# Altium PCB PCB.PcbDoc (part 2 of 2)
Units mm, origin at the board's own origin, x right, y up, seen from the top; angles counter-clockwise.
Board outline 40 x 90 mm, 4 copper layers (Top Layer, Int1 (GND), Int2, Bottom Layer (GND)), stack 0.77 mm thick; 131 components, 93 nets, 436 pads, 796 vias.
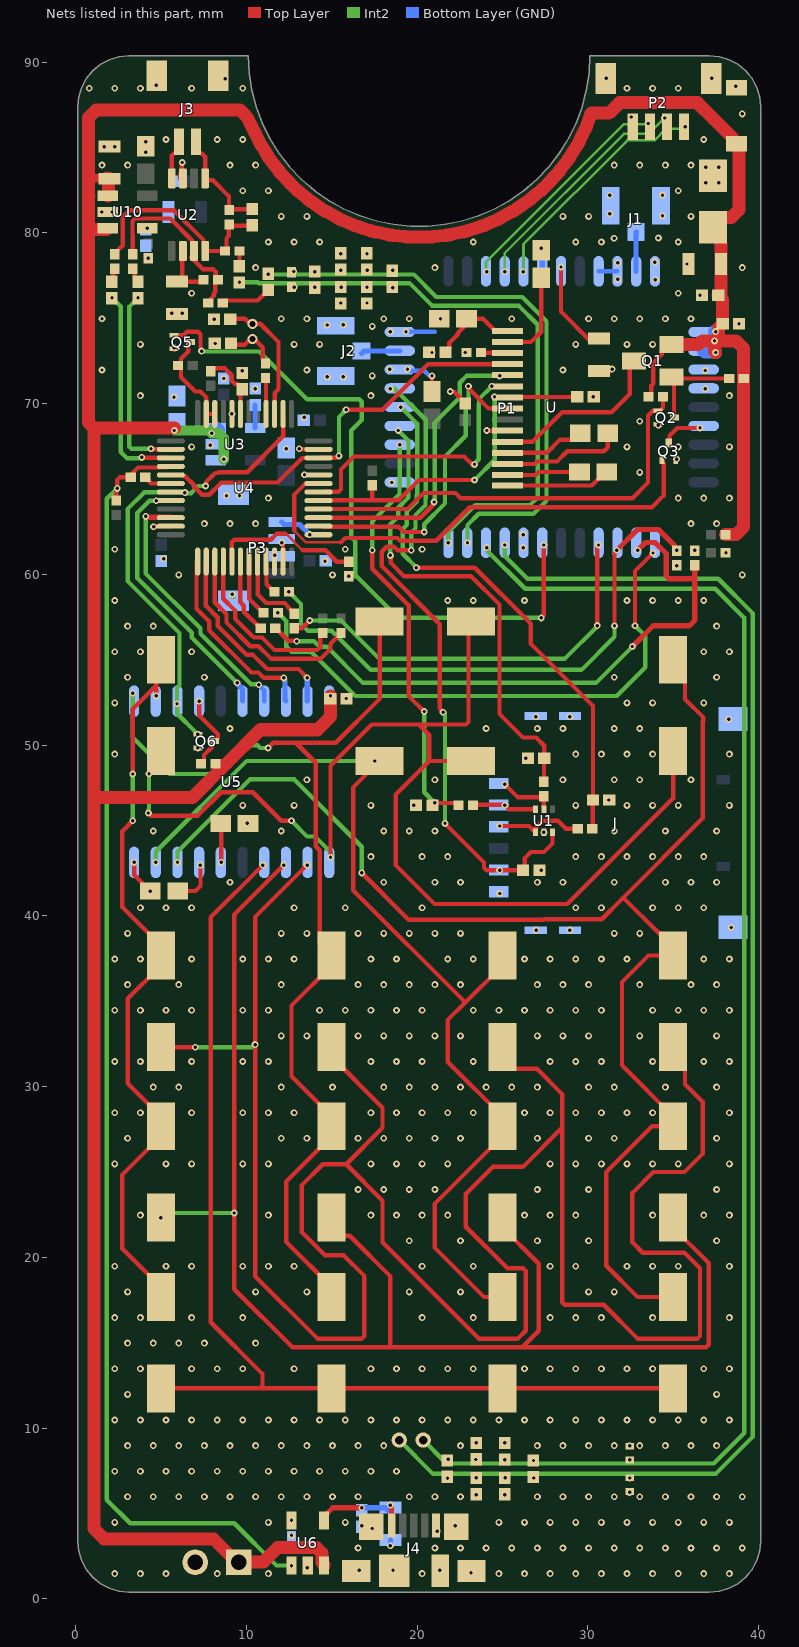
[diagram p4: the nets of this part, all layers, seen from the top]

## Via types
v1: diameter 0.4, hole 0.2, Top Layer to Bottom Layer (GND), tented both sides, 787 vias
v2: diameter 0.45, hole 0.198, Top Layer to Bottom Layer (GND), tented both sides, 9 vias

## Nets (pads, with @x,y where several pads share a name; then routed paths per layer and width w, separated by ;. In a path a pad name is that pad's centre, name@x,y a point inside that pad or via, vN(x,y) a via of type N, cw(c..) or ccw(c..) an arc to the next point about the centre after c; other vN are vias at no path point) (continued)
GND: C1.2 C2.2 C3.1 C4.1 C5.2 C6.2 C7.1 C8.2 C9.1 C10.1 C11.1 C12.1 C13.1 C16.1 C17.2 C18.2 C21.1 C22.1 C23.2 C24.1 C25.2 C26.2 C29.1 C30.1 C35.2 C36.2 C37.2 C38.1 C39.1 C41.1 C42.1 C43.1 C44.1 C45.1 C46.2 C47.2 C49.2 C50.2 C51.1 C52.2 C53.2 C100.2 C101.1 C102.1 D1.2 D2.1 D3.1 J1.2 J1.3 J2.2 J2.3 J3.3 J3.4 J4.5 J4.6 J4.7 J4.8 J4.9 J4.10 J4.11 J.C5 J.G1 J.G2 J.G3 J.G4 J.G5 J.G6 P1.6 P2.4 P2.MP1 P2.MP2 P3.3 P3.MP1 P3.MP2 P4.2 Q2.2 Q3.2 Q5.2 Q6.2 R4.2 R15.1 R24.2 R25.2 R26.2 R29.2 U1.2 U2.7 U3.2 U4.8 U4.23 U4.35 U4.44 U4.47 U5.10 U6.2 U10.2 U.8 U.13 U.19 U.21 U.27 U.30 U.31 U.33 U.36 U.37 | length 20.5
  Top Layer w0.254: v1(3.429,43.129) 3.429,42.404 3.903,41.93 3.903,41.832 C53.2@4.282,41.453 ; R15.1@4.21,78.461 v1(4.267,78.518) ; v1(4.572,62.789) 4.595,62.812 5.568,62.812 U4.23@5.581,62.825 ; v1(5.639,75.286) 5.908,75.286 C35.2@5.944,75.25 6.213,75.25 v1(6.248,75.286) ; Q5.2@5.758,73.209 5.758,73.185 Q5.2@5.791,73.152 ; U2.7@6.131,83.193 U2.7@6.131,83.459 ; U2.7@6.22,83.549 6.22,84.097 v1(6.248,84.125) ; C46.2@8.108,74.94 v1(8.129,74.94) ; C47.2@8.151,73.526 v1(8.172,73.526) ; C41.1@9.754,71.802 v1(9.754,71.918) ; v1(10.058,45.415) C52.2@10.098,45.415 ; v1(12.075,61.865) 12.075,61.825 12.147,61.753 12.147,61.446 12.164,61.429 U4.35@12.164,60.758 ; v1(13.106,67.361) 13.134,67.334 14.222,67.334 U4.47@14.231,67.325 ; v1(13.564,1.829) 13.601,1.866 U6.2@13.601,1.945 ; v1(15.85,52.73) C51.1@15.871,52.73 ; J4.8@16.437,1.631 16.566,1.631 v1(16.612,1.676) ; J4.6@17.324,4.206 17.324,4.164 v1(17.374,4.115) ; v1(18.593,1.676) 18.617,1.676 J4.9@18.662,1.631 ; v1(19.812,46.482) C23.2@19.943,46.482 ; C23.2@19.943,46.33 C23.2@19.964,46.33 ; C10.1@20.705,73 v1(20.879,73) ; C12.1@20.879,70.714 v1(20.879,71.628) ; J4.5@21.112,4.291 21.112,4.034 v1(21.184,3.962) ; C9.1@21.296,74.981 v1(21.376,74.981) ; v1(21.336,1.676) 21.362,1.65 J4.10@21.362,1.631 ; v1(21.946,70.714) 22.151,70.714 22.839,70.025 C13.1@22.839,70.004 ; v1(22.25,4.267) 22.25,4.255 J4.7@22.3,4.206 ; v1(22.828,73) R4.2@22.892,73 ; v1(23.165,1.524) 23.165,1.609 J4.11@23.187,1.631 ; C17.2@23.466,6.119 23.466,6.099 v1(23.47,6.096) ; C21.1@23.47,9.129 v1(23.47,9.144) ; v1(24.089,68.428) 24.093,68.423 25.294,68.423 P1.6@25.298,68.418 ; v1(25.146,6.096) 25.146,6.118 C18.2@25.149,6.121 ; C22.1@25.146,9.123 v1(25.146,9.144) ; v1(26.365,49.225) C16.1@26.496,49.225 ; C8.2@27.28,78.983 v1(27.28,79.096) ; v1(30.328,70.409) C11.1@30.349,70.409 ; v1(31.242,46.787) C24.1@31.263,46.787 ; v1(32.45,8.968) 32.461,8.957 D3.1@32.461,8.934 ; v1(32.454,6.234) D2.1@32.454,6.292 ; Q2.2@34.105,68.79 34.105,68.765 v1(34.138,68.732) ; Q3.2@35.147,66.718 35.18,66.751 v1(35.204,66.751) ; v1(35.204,60.503) R24.2@35.204,60.535 ; v1(35.814,78.181) C2.2@35.895,78.181 ; R25.2@36.271,61.385 v1(36.271,61.417) ; v1(36.576,76.352) C3.1@36.686,76.352 ; R26.2@38.068,61.265 v1(38.1,61.265) ; v1(38.672,88.582) 38.71,88.544 D1.2@38.71,88.503
  Top Layer w0.305: C5.2@27.17,42.672 v1(27.28,42.672) ; C1.2@30.656,71.917 31.319,71.917 v1(31.43,72.027)
  Int2 w0.254: v1@9.189,58.679 v1@9.256,58.679 ; v1(27.28,79.096) 27.28,79.056 v1@27.339,78.996
  Bottom Layer (GND) w0.254: v1(19.355,74.219) 21.031,74.219 ; v1(19.443,72.006) 19.517,71.933 20.422,71.933 20.698,71.656 20.851,71.656 v1(20.879,71.628) ; U.30@30.639,77.749 U.31@31.739,77.749
  Bottom Layer (GND) w0.305: C50.2@16.764,4.115 C50.2@16.764,4.224 ; v1(18.44,3.109) C49.2@18.44,3.434 ; v1(27.28,79.096) 27.28,79.07 27.339,79.01 U.27@27.339,77.749 ; v1(31.547,79.691) v1@31.565,79.673
  other v1: 2.298,1.472 3.798,1.472 5.298,1.472 8.298,1.472 11.298,1.472 20.298,1.472 24.798,1.472 26.298,1.472 27.798,1.472 29.298,1.472 30.798,1.472 32.298,1.472 33.798,1.472 35.298,1.472 36.798,1.472 38.298,1.472 16.548,2.972 21.048,2.972 22.548,2.972 24.048,2.972 25.548,2.972 27.048,2.972 28.548,2.972 30.048,2.972 31.548,2.972 33.048,2.972 34.548,2.972 36.048,2.972 37.548,2.972 39.048,2.972 12.649,3.712 16.764,4.267 2.298,4.472 11.298,4.472 15.798,4.472 24.798,4.472 26.298,4.472 27.798,4.472 29.298,4.472 30.798,4.472 32.298,4.472 33.798,4.472 35.298,4.472 36.798,4.472 38.298,4.472 3.048,5.972 4.548,5.972 6.048,5.972 7.548,5.972 9.048,5.972 10.548,5.972 12.048,5.972 13.548,5.972 15.048,5.972 16.548,5.972 19.548,5.972 21.048,5.972 22.548,5.972 27.048,5.972 28.548,5.972 30.048,5.972 31.548,5.972 33.048,5.972 34.548,5.972 36.048,5.972 37.548,5.972 39.048,5.972 2.298,7.472 3.798,7.472 5.298,7.472 6.798,7.472 8.298,7.472 9.798,7.472 11.298,7.472 12.798,7.472 14.298,7.472 15.798,7.472 17.298,7.472 18.798,7.472 3.048,8.972 4.548,8.972 6.048,8.972 7.548,8.972 9.048,8.972 10.548,8.972 12.048,8.972 13.548,8.972 15.048,8.972 16.548,8.972 18.048,8.972 22.548,8.972 27.048,8.972 28.548,8.972 30.048,8.972 31.548,8.972 33.048,8.972 34.548,8.972 36.048,8.972 37.548,8.972 2.298,10.472 3.798,10.472 5.298,10.472 6.798,10.472 8.298,10.472 9.798,10.472 11.298,10.472 12.798,10.472 14.298,10.472 15.798,10.472 17.298,10.472 18.798,10.472 20.298,10.472 21.798,10.472 23.298,10.472 24.798,10.472 26.298,10.472 27.798,10.472 29.298,10.472 30.798,10.472 32.298,10.472 33.798,10.472 35.298,10.472 36.798,10.472 38.298,10.472 3.048,11.972 37.548,11.972 2.298,13.472 3.798,13.472 6.798,13.472 8.298,13.472 9.798,13.472 12.798,13.472 17.298,13.472 18.798,13.472 20.298,13.472 21.798,13.472 23.298,13.472 26.298,13.472 27.798,13.472 29.298,13.472 30.798,13.472 32.298,13.472 33.798,13.472 36.798,13.472 38.298,13.472 3.048,14.972 4.548,14.972 6.048,14.972 7.548,14.972 10.548,14.972 2.298,16.472 3.798,16.472 6.798,16.472 9.798,16.472 20.298,16.472 23.298,16.472 27.798,16.472 29.298,16.472 30.798,16.472 33.798,16.472 38.298,16.472 3.048,17.972 10.548,17.972 13.548,17.972 19.548,17.972 22.548,17.972 30.048,17.972 31.548,17.972 2.298,19.472 5.298,19.472 6.798,19.472 9.798,19.472 11.298,19.472 12.798,19.472 20.298,19.472 23.298,19.472 27.798,19.472 29.298,19.472 32.298,19.472 33.798,19.472 35.298,19.472 38.298,19.472 19.548,20.972 22.548,20.972 27.048,20.972 30.048,20.972 37.548,20.972 3.798,22.472 11.298,22.472 17.298,22.472 18.798,22.472 20.298,22.472 21.798,22.472 26.298,22.472 27.798,22.472 29.298,22.472 33.798,22.472 36.798,22.472 38.298,22.472 16.548,23.972 18.048,23.972 19.548,23.972 21.048,23.972 27.048,23.972 30.048,23.972 37.548,23.972 2.298,25.472 5.298,25.472 6.798,25.472 9.798,25.472 11.298,25.472 17.298,25.472 18.798,25.472 20.298,25.472 21.798,25.472 27.798,25.472 29.298,25.472 30.798,25.472 32.298,25.472 33.798,25.472 35.298,25.472 38.298,25.472 3.048,26.972 12.048,26.972 13.548,26.972 16.548,26.972 18.048,26.972 19.548,26.972 21.048,26.972 22.548,26.972 27.048,26.972 30.048,26.972 31.548,26.972 37.548,26.972 2.298,28.472 3.798,28.472 6.798,28.472 9.798,28.472 11.298,28.472 12.798,28.472 17.298,28.472 18.798,28.472 20.298,28.472 21.798,28.472 23.298,28.472 26.298,28.472 27.798,28.472 29.298,28.472 30.798,28.472 32.298,28.472 33.798,28.472 38.298,28.472 4.548,29.972 6.048,29.972 12.048,29.972 15.048,29.972 18.048,29.972 19.548,29.972 21.048,29.972 22.548,29.972 24.048,29.972 25.548,29.972 27.048,29.972 30.048,29.972 31.548,29.972 34.548,29.972 37.548,29.972 2.298,31.472 3.798,31.472 6.798,31.472 9.798,31.472 11.298,31.472 17.298,31.472 18.798,31.472 20.298,31.472 23.298,31.472 27.798,31.472 29.298,31.472 30.798,31.472 33.798,31.472 36.798,31.472 38.298,31.472 12.048,32.972 13.548,32.972 16.548,32.972 18.048,32.972 19.548,32.972 21.048,32.972 22.548,32.972 27.048,32.972 28.548,32.972 30.048,32.972 33.048,32.972 37.548,32.972 2.298,34.472 3.798,34.472 5.298,34.472 6.798,34.472 9.798,34.472 11.298,34.472 14.298,34.472 15.798,34.472 17.298,34.472 18.798,34.472 20.298,34.472 23.298,34.472 24.798,34.472 26.298,34.472 27.798,34.472 29.298,34.472 30.798,34.472 33.798,34.472 35.298,34.472 36.798,34.472 38.298,34.472 3.048,35.972 6.048,35.972 12.048,35.972 16.548,35.972 18.048,35.972 19.548,35.972 21.048,35.972 22.548,35.972 27.048,35.972 28.548,35.972 30.048,35.972 33.048,35.972 36.048,35.972 37.548,35.972 2.298,37.472 3.798,37.472 6.798,37.472 9.798,37.472 11.298,37.472 12.798,37.472 17.298,37.472 18.798,37.472 21.798,37.472 23.298,37.472 26.298,37.472 27.798,37.472 29.298,37.472 30.798,37.472 32.298,37.472 36.798,37.472 38.298,37.472 3.048,38.972 12.048,38.972 13.548,38.972 16.548,38.972 18.048,38.972 19.548,38.972 21.048,38.972 22.548,38.972 31.548,38.972 33.048,38.972 26.975,39.167 28.956,39.167 38.405,39.319 3.798,40.472 5.298,40.472 6.798,40.472 12.798,40.472 15.798,40.472 20.298,40.472 29.298,40.472 30.798,40.472 33.798,40.472 35.298,40.472 36.798,40.472 24.841,41.31 4.38,41.453 9.048,41.972 18.048,41.972 21.048,41.972 22.548,41.972 27.048,41.972 28.548,41.972 31.548,41.972 34.548,41.972 36.048,41.972 37.548,41.972 17.298,43.472 20.298,43.472 21.798,43.472 29.298,43.472 30.798,43.472 32.298,43.472 33.798,43.472 35.298,43.472 36.798,43.472 27.432,44.893 4.548,44.972 12.048,44.972 18.048,44.972 19.548,44.972 21.048,44.972 31.548,44.972 34.548,44.972 37.548,44.972 9.798,46.472 12.798,46.472 17.298,46.472 29.298,46.472 32.298,46.472 33.798,46.472 35.298,46.472 38.298,46.472 13.548,47.972 21.048,47.972 28.548,47.972 31.548,47.972 33.048,47.972 36.048,47.972 2.298,49.472 29.298,49.472 30.798,49.472 32.298,49.472 33.798,49.472 38.298,49.472 7.163,49.835 9.048,50.972 24.048,50.972 27.048,50.972 28.548,50.972 31.548,50.972 33.048,50.972 38.252,51.511 26.965,51.664 28.956,51.664 2.298,52.472 32.298,52.472 33.798,52.472 36.798,52.472 3.048,53.972 7.548,53.972 31.548,53.972 37.548,53.972 2.298,55.472 3.798,55.472 6.798,55.472 36.798,55.472 38.298,55.472 3.048,56.972 4.548,56.972 37.548,56.972 2.298,58.472 21.798,58.472 23.298,58.472 26.298,58.472 32.298,58.472 33.798,58.472 35.298,58.472 36.798,58.472 9.189,58.826 6.048,59.972 15.048,59.972 39.048,59.972 14.61,60.778 5.159,60.916 2.298,61.472 15.798,61.472 20.298,61.472 26.213,61.57 26.213,62.332 7.548,62.972 9.048,62.972 10.548,62.972 36.048,62.972 37.548,62.972 11.298,64.472 35.298,64.472 36.798,64.472 38.298,64.472 8.839,64.618 9.601,64.618 18.523,65.383 13.411,65.837 33.048,65.972 12.344,67.361 6.798,67.472 32.298,67.472 35.298,67.472 38.298,67.472 7.885,67.555 33.048,68.972 13.39,69.199 9.156,69.4 5.766,70.384 3.798,70.472 17.298,70.472 38.298,70.472 10.516,70.866 36.881,70.866 8.682,71.474 14.749,71.568 15.691,71.566 17.374,71.628 36.881,71.942 1.548,71.972 13.548,71.972 28.548,71.972 18.41,72.013 5.791,73.272 3.798,73.472 12.798,73.472 14.298,73.472 29.298,73.472 32.298,73.472 33.798,73.472 18.44,74.219 17.374,74.524 14.734,74.608 15.691,74.614 38.862,74.676 1.548,74.972 12.048,74.972 13.548,74.972 18.048,74.972 19.548,74.972 25.548,74.972 30.048,74.972 31.548,74.972 33.048,74.972 34.548,74.972 36.048,74.972 15.545,75.895 17.069,75.895 6.798,76.472 35.298,76.472 31.759,77.279 33.962,77.261 10.548,77.972 21.048,77.972 39.048,77.972 31.759,78.246 33.937,78.295 15.545,78.791 17.069,78.791 11.298,79.472 12.798,79.472 14.298,79.472 23.298,79.472 29.298,79.472 30.798,79.472 35.298,79.472 34.138,79.705 12.048,80.972 13.548,80.972 28.548,80.972 30.048,80.972 36.048,80.972 34.379,81.001 31.3,81.129 31.289,82.207 34.379,82.22 9.798,82.472 11.298,82.472 35.298,82.472 36.912,82.93 37.674,82.93 36.912,83.845 37.674,83.845 1.548,83.972 3.048,83.972 9.048,83.972 10.548,83.972 31.548,83.972 33.048,83.972 34.548,83.972 36.048,83.972 5.298,85.472 8.298,85.472 9.798,85.472 36.798,85.472 32.542,86.794 39.048,86.972 0.798,88.472 2.298,88.472 3.798,88.472 6.798,88.472 9.798,88.472 32.298,88.472 33.798,88.472 35.298,88.472 4.724,88.655 8.76,89.033 31.074,89.067 37.274,89.067
  other v2: 1.524,81.229 2.134,81.229 4.115,84.734 1.676,85.039 2.286,85.039 4.115,85.344
KBD_A: U4.26 U5.19 | length 12
  Top Layer w0.254: U4.26@7.62,60.75 7.62,58.173 8.331,57.462 8.331,56.978 10.021,55.287 10.397,55.287 11.227,54.458 13.056,54.458 v1(13.564,53.95)
  Int2 w0.254: v1(13.564,53.95) v1@13.576,53.937
  Bottom Layer (GND) w0.305: v1(13.564,53.95) 13.576,53.937 13.576,52.591 U5.19@13.589,52.579
KBD_B: U4.25 U5.18 | length 11.4
  Top Layer w0.254: U4.25@7.087,60.75 7.087,57.988 7.823,57.252 7.823,56.729 10.298,54.254 10.712,54.254 11.016,53.95 12.183,53.95 v1(12.192,53.94)
  Int2 w0.254: v1(12.192,53.94) 12.192,53.901 v1@12.253,53.84
  Bottom Layer (GND) w0.305: v1(12.192,53.94) 12.192,53.914 12.263,53.844 12.263,52.635 U5.18@12.319,52.579
KBD_C: U4.22 U5.17 | length 15.4
  Top Layer w0.305: v1(4.115,63.398) 4.141,63.398 4.194,63.345 U4.22@5.561,63.345
  Int2 w0.254: v1(4.115,63.398) 4.105,63.389 4.105,60.055 7.315,56.845 7.315,56.519 10.273,53.561 10.658,53.561 10.686,53.533 v1(10.726,53.533)
  Bottom Layer (GND) w0.254: v1(10.726,53.533) 10.726,53.53 11.049,53.207 U5.17@11.049,52.579
KBD_D: U4.20 U5.16 | length 15.8
  Top Layer w0.254: v1(4.724,64.314) 4.73,64.32 5.576,64.32 U4.20@5.581,64.325
  Int2 w0.254: v1(4.724,64.314) 4.33,64.314 3.61,63.594 3.61,59.788 6.807,56.591 6.807,56.308 v1(9.46,53.656)
  Bottom Layer (GND) w0.305: v1(9.46,53.656) 9.478,53.638 9.478,53.585 9.779,53.283 U5.16@9.779,52.579
KBD_DA: Q6.1 U4.2 U4.19 U5.13 | length 28.3
  Top Layer w0.254: U4.19@5.581,64.825 5.59,64.816 6.382,64.816 v1(6.407,64.79) ; v1(7.62,65.176) 7.648,65.204 7.648,65.408 7.925,65.684 7.925,65.688 8.178,65.941 8.334,65.941 8.382,65.989 10.058,65.989 12.156,68.087 U4.2@12.156,69.4
  Int2 w0.254: v1(7.163,50.635) 7.038,50.635 7.03,50.643 7.03,50.768 5.953,51.845 5.953,52.416 v1(5.944,52.426) 5.944,53.341 6.092,53.49 6.092,56.57 3.048,59.614 3.048,63.832 4.032,64.816 6.382,64.816 v1(6.407,64.79) 6.435,64.763 6.539,64.763 6.551,64.75 6.761,64.75 7.187,65.176 v1(7.62,65.176)
LCD_CS: P1.8 U4.38 | length 18.5
  Top Layer w0.254: U4.38@14.531,62.789 18.919,62.789 19.224,62.484 v1(20.422,62.484) ; v1(23.012,71.018) 23.012,70.902 24.196,69.718 P1.8@25.298,69.718
  Int2 w0.254: v1(20.422,62.484) 20.422,62.941 21.641,64.16 21.641,66.904 22.86,68.123 22.86,69.952 23.012,70.104 v1(23.012,71.018)
LCD_DC: C11.2 P1.9 R6.2 U4.41 | length 20.8
  Top Layer w0.254: U4.41@14.231,64.325 14.244,64.338 17.374,64.338 ; R6.2@17.374,65.227 17.374,64.338 ; v1(23.368,65.532) 20.117,65.532 18.923,64.338 17.374,64.338 ; v1(24.536,70.409) 24.577,70.368 P1.9@25.298,70.368 25.319,70.389 29.372,70.389 C11.2@29.392,70.409
  Int2 w0.254: v1(23.368,65.532) 24.555,66.719 24.555,70.39 v1(24.536,70.409)
LCD_RST: P1.10 U4.42 | length 16.4
  Top Layer w0.254: U4.42@14.549,64.846 15.396,64.846 15.545,64.995 15.545,66.142 16.307,66.904 22.758,66.904 23.216,66.446 v1(23.368,66.446) ; v1(24.384,71.018) P1.10@25.298,71.018
  Int2 w0.254: v1(23.368,66.446) 23.368,66.486 23.622,66.74 23.622,69.995 23.633,70.007 23.633,70.268 v1(24.384,71.018)
LCD_SCLK: P1.11 U4.39 | length 17.1
  Top Layer w0.254: U4.39@14.649,63.322 20.193,63.322 21.004,64.133 v1(21.004,64.242) ; P1.11@25.298,71.668 25.339,71.628 P1.11@25.451,71.628
  Int2 w0.254: v1(21.004,64.242) 21.031,64.269 21.031,68.885 22.504,70.358 22.504,71.229 22.904,71.628 v1(24.841,71.628)
LCD_SDIN: P1.12 U4.17 U4.46 | length 24.5
  Top Layer w0.254: U4.17@5.581,65.825 6.268,65.825 6.352,65.741 6.429,65.741 6.919,65.251 6.919,65.159 7.41,64.668 7.83,64.668 8.542,65.38 11.837,65.38 13.273,66.816 U4.46@14.132,66.816 ; U4.46@14.362,66.826 15.27,66.826 15.387,66.943 v1(15.426,66.943) ; v1(15.85,69.647) 17.983,69.647 20.655,72.318 P1.12@25.298,72.318
  Int2 w0.254: v1(15.426,66.943) 15.426,69.224 v1(15.85,69.647)
LCD_SHUTD: Q2.1 R31.1 U4.40 | length 25.2
  Top Layer w0.254: U4.40@14.859,63.83 19.438,63.83 20.378,64.77 22.25,64.77 22.555,64.465 32.614,64.465 33.528,65.38 33.528,69.29 33.819,69.582 34.068,69.582 Q2.1@34.084,69.598 ; Q2.1@34.105,69.59 34.23,69.59 34.41,69.77 R31.1@34.41,70.409
NetC1_1: C1.1 U.28 | length 5.6
  Top Layer w0.254: v1(28.434,78.004) 28.434,75.391 30.182,73.643 C1.1@30.727,73.643
NetC8_1: C8.1 P1.14 | length 5.4
  Top Layer w0.254: P1.14@25.298,73.618 25.308,73.609 26.67,73.609 27.28,74.219 C8.1@27.28,77.379
NetC9_2: C9.2 C10.2 P1.15 | length 5
  Top Layer w0.254: C10.2@21.662,73 21.684,73 21.893,73.209 21.893,73.556 22.383,74.046 22.383,74.145 23.219,74.981 23.861,74.981 24.573,74.268 P1.15@25.298,74.268
NetC14_1: C14.1 P1.3 | length 7.1
  Top Layer w0.254: P1.3@25.298,66.468 26.888,66.468 27.03,66.61 28.206,66.61 28.804,67.208 30.937,67.208 31.169,67.441 C14.1@31.169,68.275
NetC14_2: C14.2 P1.4 | length 4.7
  Top Layer w0.254: P1.4@25.298,67.118 27.596,67.118 28.374,67.896 29.187,67.896 C14.2@29.566,68.275
NetC15_1: C15.1 P1.1 | length 6.2
  Top Layer w0.254: P1.1@25.294,65.208 30.23,65.208 31.022,66 C15.1@31.12,66
NetC15_2: C15.2 P1.2 | length 4.3
  Top Layer w0.254: P1.2@25.298,65.818 26.956,65.818 27.138,66 C15.2@29.516,66
NetC16_2: C16.2 R2.1 U.16 | length 27.7
  Top Layer w0.254: v1(18.44,61.112) 18.468,61.084 18.468,60.671 19.246,59.893 23.165,59.893 24.828,58.23 24.828,51.83 26.213,50.444 26.975,50.444 27.453,49.966 C16.2@27.453,49.225 27.443,49.215 27.443,47.864 R2.1@27.432,47.854
  Int2 w0.254: v1(18.44,61.112) 18.44,62.941 18.898,63.398 18.898,63.899 19.48,64.482 19.48,64.873 19.497,64.89 19.497,67.828 v1(18.898,68.428)
NetC17_1: C17.1 C18.1 C19.2 C20.2 D2.2 MK1.1 U.9 | length 88.4
  Int2 w0.254: MK1.1@18.96,9.296 20.941,7.315 21.78,7.315 21.78,7.067 v1(21.788,7.06) ; 21.793,7.315 23.469,7.315 ; v1(23.469,7.08) 23.47,7.315 ; v1(25.146,61.722) 25.146,61.069 26.474,59.741 37.643,59.741 39.675,57.709 39.675,9.5 37.49,7.315 32.461,7.315 32.461,7.076 v1(32.458,7.073) ; v1(25.167,7.082) 25.146,7.103 25.146,7.315 ; v1(26.837,7.077) 26.837,7.315 25.146,7.315 ; 26.838,7.315 32.458,7.315 ; 23.47,7.315 25.146,7.315
NetC19_1: C19.1 C20.1 C21.2 C22.2 D3.2 MK1.2 U.10 | length 85.4
  Top Layer w0.254: v1(32.461,8.134) D3.2@32.461,8.14
  Int2 w0.254: MK1.2@20.36,9.296 21.658,7.998 ; 21.731,7.925 21.731,8.032 21.835,8.136 v1(21.835,8.175) ; 21.835,7.925 23.445,7.925 ; v1(23.445,8.157) 23.473,8.129 23.473,7.941 23.49,7.925 25.144,7.925 v1(25.144,8.143) ; v1(24.079,61.57) 24.107,61.542 24.107,61.389 26.34,59.157 37.465,59.157 39.167,57.455 39.167,9.71 37.382,7.925 32.461,7.925 v1(32.461,8.134) ; 25.146,7.925 v1@26.822,7.925 ; v1@26.833,7.925 32.45,7.925
  other v1: 26.822,8.099
NetC23_1: C23.1 R1.2 U.15 | length 24.6
  Top Layer w0.254: v1@17.374,61.416 17.374,60.329 19.507,58.195 19.507,52.883 v1(20.422,51.968) ; v1(21.031,46.634) 21.059,46.606 22.311,46.606 R1.2@22.435,46.482
  Int2 w0.254: v1(17.374,61.417) 17.374,63.094 18.972,64.692 18.972,65.172 18.989,65.19 v1(18.989,67.599) ; v1(20.422,51.968) 20.422,47.244 v1(21.031,46.634)
NetC24_2: C24.2 R3.1 U.17 | length 32.1
  Top Layer w0.254: v1(19.964,60.389) 23.388,60.389 26.67,57.106 26.67,55.931 30.306,52.295 C24.2@30.306,46.787 30.285,46.765 30.285,45.132 R3.1@30.263,45.11
  Int2 w0.254: v1(19.05,69.799) 20.005,68.844 20.005,64.68 19.988,64.663 19.988,64.271 19.406,63.689 19.406,62.905 19.164,62.664 19.164,61.212 19.964,60.412 v1(19.964,60.389)
NetC31_2: C31.2 R9.1 | length 0.7
  Top Layer w0.254: R9.1@3.448,77.742 3.448,77.345 C31.2@3.658,77.136
NetC32_2: C32.2 R10.1 | length 0.8
  Top Layer w0.254: C32.2@2.134,77.136 2.21,77.212 2.21,77.832 R10.1@2.286,77.909
NetC33_2: C33.2 R13.1 | length 2.9
  Top Layer w0.254: R13.1@8.622,75.895 R13.1@8.639,75.911 ; R13.1@8.655,76.048 10.668,76.048 11.047,76.427 11.068,76.427 11.278,76.636 C33.2@11.278,76.657
NetC34_2: C34.2 R14.1 | length 0.9
  Top Layer w0.254: C34.2@9.601,78.05 R14.1@9.601,78.943 R14.1@9.626,78.943
NetC35_1: C35.1 R11.1 U2.2 | length 3.6
  Top Layer w0.254: U2.2@6.248,79.005 6.248,77.373 6.025,77.15 C35.1@5.944,77.15 R11.1@7.548,77.15
NetC39_2: C39.2 U3.4 | length 1.4
  Bottom Layer (GND) w0.305: U3.4@10.516,68.58 C39.2@10.516,69.93
NetC41_2: C41.2 R16.2 U4.7 | length 4
  Top Layer w0.254: R16.2@7.925,71.919 8.073,72.067 8.749,72.067 9.151,71.666 9.151,71.334 9.307,71.177 9.442,71.177 9.665,70.955 9.665,69.409 U4.7@9.656,69.4
NetC46_1: C46.1 U4.3 Y1.2 | length 7.7
  Top Layer w0.254: C46.1@9.065,74.94 9.106,74.981 9.925,74.981 Y1.2@10.296,74.609 ; Y1.2@10.363,74.676 Y1.2@10.363,74.676 10.819,74.677 11.887,73.609 11.887,70.842 11.664,70.619 U4.3@11.664,69.408
NetC47_1: C47.1 R17.1 Y1.1 | length 3.1
  Top Layer w0.254: C47.1@9.108,73.526 9.177,73.457 9.903,73.457 10.103,73.657 10.227,73.657 10.363,73.793 Y1.1@10.363,73.824 ; Y1.1@10.504,73.74 10.973,73.271 10.973,72.535 11.125,72.383 R17.1@11.125,72.358
NetC48_1: C48.1 R10.2 R12.1 R14.2 U2.4 | length 12.6
  Top Layer w0.254: R10.2@2.286,78.759 2.434,78.907 2.434,78.939 2.765,79.27 2.765,80.938 3.155,81.328 5.744,81.328 7.491,79.582 7.491,79.041 U2.4@7.589,78.943 R14.2@8.751,78.943 8.839,79.031 8.839,79.691 8.966,79.818 8.966,80.326 8.908,80.385 8.908,80.431 10.044,80.431 C48.1@10.058,80.446
NetC48_2: C48.2 J3.1 R12.2 U2.5 | length 6.1
  Top Layer w0.254: J3.1@7.053,85.332 7.053,84.857 7.226,84.684 7.365,84.684 7.589,84.461 7.589,83.187 7.687,83.089 8.046,83.089 8.992,82.144 8.992,81.671 8.987,81.667 8.987,81.382 10.037,81.382 C48.2@10.058,81.403
NetC49_1: C49.1 C50.1 J4.1 U6.4 | length 5.7
  Top Layer w0.305: U6.4@14.551,4.595 14.551,4.82 15.064,5.334 v1(16.764,5.334) ; v1(18.44,5.486) 18.44,5.461 18.512,5.389 J4.1@18.512,4.291
  Bottom Layer (GND) w0.305: v1(16.764,5.334) 18.136,5.334 18.288,5.182 C49.1@18.44,5.334
NetC52_1: C52.1 U5.6 | length 2.3
  Top Layer w0.254: C52.1@8.495,45.415 8.534,45.375 v1(8.534,43.129)
NetC53_1: C53.1 U5.7 | length 2.7
  Top Layer w0.254: C53.1@5.983,41.453 7.014,41.453 7.315,41.754 v1(7.315,42.977)
NetC101_2: C101.2 U10.4
  other v2: 4.198,80.279
NetJ1_1: J1.1 U.32 | length 2.3
  Bottom Layer (GND) w0.293: U.32@32.839,77.749 J1.1@32.839,80.046
  Bottom Layer (GND) w0.305: J1.1@32.824,80.061 J1.1@32.839,80.046
NetJ2_1: J2.1 U.20 | length 2.3
  Bottom Layer (GND) w0.293: J2.1@16.865,73.099 U.20@18.989,73.099
  Bottom Layer (GND) w0.305: J2.1@16.758,72.937 J2.1@16.858,73.037
NetJ3_2: J3.2 U2.8 | length 2.2
  Top Layer w0.254: U2.8@5.639,83.258 5.639,84.536 5.788,84.684 5.88,84.684 5.916,84.721 J3.2@5.916,85.317
NetP1_13: P1.13 R4.1 | length 1.7
  Top Layer w0.254: R4.1@23.622,73 23.638,72.984 25.283,72.984 P1.13@25.298,72.968
NetP2_1: P2.1 U.26 | length 13.9
  Int2 w0.152: v1@26.239,77.749 26.239,79.344 32.315,85.42 33.909,85.42 34.595,86.106 35.204,86.106 35.21,86.112 35.537,86.112 35.643,86.218 v1(35.71,86.218)
  Bottom Layer (GND) w0.305: v1(26.213,77.724) U.26@26.239,77.749
NetP2_2: P2.2 U.25 | length 13.7
  Int2 w0.152: v1@25.139,77.749 25.139,78.819 32.122,85.801 33.569,85.801 34.39,86.622 v1(34.499,86.731)
  Bottom Layer (GND) w0.305: U.25@25.139,77.749 25.139,77.731 v1(25.146,77.724)
NetP2_3: P2.3 U.24 | length 13.5
  Int2 w0.152: v1@24.039,77.749 24.039,78.294 32.124,86.378 33.544,86.378 v1@33.577,86.411
  Bottom Layer (GND) w0.305: U.24@24.039,77.749 24.064,77.724 v1(24.079,77.724)
  other v1: 33.534,86.411
NetQ1_1: Q1.1 Q2.3 R5.2 | length 5.6
  Top Layer w0.254: Q1.1@34.9,71.557 Q1.1@34.981,71.476 ; Q2.3@35.052,69.341 35.052,71.404 Q1.1@34.981,71.476 ; R5.2@38.285,71.476 35.085,71.476 Q1.1@34.981,71.476
NetQ3_3: Q3.3 U.39 | length 2.4
  Top Layer w0.254: Q3.3@34.747,67.698 34.789,67.741 34.789,68.127 35.242,68.58 v1(36.576,68.58)
NetQ5_3: Q5.3 R7.1 U4.10 U4.11 | length 5.9
  Top Layer w0.254: Q5.3@6.738,73.609 6.658,73.609 6.605,73.556 6.605,73.052 6.181,72.627 6.181,72.386 6.033,72.238 6.181,72.09 6.181,71.543 7.01,70.714 7.31,70.714 7.664,70.359 7.664,69.4 U4.10@8.156,69.4
NetQ6_3: Q6.3 R30.1 U5.14 | length 4.6
  Top Layer w0.254: v1(7.239,52.579) 7.239,51.74 8.332,50.647 8.332,50.437 8.276,50.381 8.276,50.288 8.223,50.235 8.063,50.235 8.01,50.182 8.01,49.91 7.52,49.42 7.52,49.068 7.495,49.068 R30.1@7.347,48.92
NetR8_2: R8.2 U4.30 | length 4.4
  Top Layer w0.254: U4.30@9.656,60.75 9.656,58.365 9.855,58.166 9.855,57.818 10.828,56.845 R8.2@10.853,56.845
NetR9_2: R9.2 R11.2 R13.2 U2.3 | length 10.4
  Top Layer w0.254: R9.2@3.353,78.759 3.353,79.847 3.331,79.869 3.331,80.69 3.488,80.846 5.544,80.846 6.841,79.549 6.841,79.041 U2.3@6.939,78.943 ; U2.3@6.781,78.563 7.468,77.876 8.056,77.876 8.205,77.728 8.205,77.412 R11.2@8.35,77.267 ; R13.2@7.805,76.048 7.83,76.048 8.088,76.306 8.088,76.433 8.177,76.522 8.177,77.119 R11.2@8.325,77.267
NetR17_2: R17.2 U4.4 | length 1.9
  Top Layer w0.254: U4.4@11.156,69.4 R17.2@11.156,71.329
NetR18_2: R18.2 U4.31 | length 3.6
  Top Layer w0.254: U4.31@10.164,60.96 10.164,58.576 10.98,57.76 R18.2@11.005,57.76
NetR19_2: R19.2 U4.32 | length 4.5
  Top Layer w0.254: U4.32@10.672,60.734 10.672,58.822 11.173,58.322 12.245,58.322 12.445,58.122 12.445,58.077 12.802,57.72 R19.2@12.802,57.695
NetR20_2: R20.2 U4.33 | length 1.8
  Top Layer w0.254: U4.33@11.18,60.572 11.18,59.421 11.622,58.979 R20.2@11.647,58.979
NetR21_1: R21.1 U4.28 | length 10.3
  Top Layer w0.254: U4.28@8.656,60.75 8.656,58.574 9.347,57.883 9.347,57.398 10.442,56.303 10.927,56.303 11.655,55.575 14.166,55.575 14.33,55.739 14.33,56.425 R21.1@14.478,56.573
NetR22_1: R22.1 U4.29 | length 8.7
  Top Layer w0.152: 12.294,62.373 12.344,62.373 13.305,61.412
  Top Layer w0.254: U4.29@9.156,60.903 9.156,61.878 9.305,62.027 11.43,62.027 11.776,62.373 12.294,62.373 ; 13.305,61.412 14.636,61.412 15.304,60.743 R22.1@16.002,60.743
NetR23_2: R23.2 U4.27 | length 12.2
  Top Layer w0.254: U4.27@8.148,60.742 8.148,58.364 8.839,57.672 8.839,57.188 10.232,55.795 10.716,55.795 11.444,55.067 14.376,55.067 14.937,55.628 14.937,55.94 15.545,56.548 R23.2@15.545,56.573
NetR27_1: R27.1 R28.1 U4.16 U6.1 | length 76.4
  Top Layer w0.254: R27.1@2.382,64.327 2.382,64.979 v1(2.438,65.035) 2.438,65.532 2.591,65.684 R28.1@3.233,65.684 ; R28.1@3.152,65.757 3.657,66.262 U4.16@5.322,66.262
  Int2 w0.254: v1(2.438,65.035) 1.829,64.426 1.829,48.311 1.829,5.791 3.2,4.42 9.296,4.42 11.771,1.945 v1(12.651,1.945)
NetR28_2: R28.2 U4.18 | length 1.6
  Top Layer w0.254: R28.2@4.086,65.688 R28.2@4.083,65.684 4.108,65.684 4.293,65.499 4.293,65.474 4.442,65.325 U4.18@5.491,65.325
NetR29_1: R29.1 U6.5 | length 0.1
  Bottom Layer (GND) w0.305: R29.1@12.649,4.508 12.651,4.509 v1(12.651,4.595)
NetS1_1: S1.1 S2.1 S3.1 S4.1 U5.1 | length 72.6
  Top Layer w0.254: v1(4.267,46.025) 4.42,45.872 7.163,45.872 8.534,47.244 10.376,47.244 12.053,45.568 v1(12.649,45.568) ; v1(4.302,48.327) 4.302,48.952 S1.1@5,49.65 ; v1(14.935,43.434) 14.935,48.796 17.346,51.206 20.117,51.206 ; S3.1@21.888,49.767 22.406,49.249 S3.1@22.406,49.069 ; S3.1@23.161,49.069 S3.1@22.406,49.069 ; S2.1@23.161,57.249 23.012,57.101 23.012,51.355 22.864,51.206 20.117,51.206 ; S4.1@35,49.65 35,46.887 28.804,40.691 21.031,40.691 18.745,42.977 18.745,47.092 20.723,49.069 ; 20.117,51.206 20.193,51.13 20.723,50.6 20.723,49.069 ; 20.723,49.069 21.946,49.069 S3.1@22.406,49.069
  Int2 w0.254: v1(4.267,46.025) 4.267,46.177 4.302,46.212 v1(4.302,48.327) ; v1(12.649,45.568) 13.564,44.653 14.021,44.653 14.935,43.739 v1(14.935,43.434)
NetS1_2: S1.2 S5.2 S9.2 S13.2 U5.12 | length 43.3
  Top Layer w0.254: v1(3.353,45.568) 2.743,44.958 2.743,40.507 5,38.25 S5.2@5,37.675 5,37.1 3.048,35.148 3.048,30.202 3.841,29.409 5,28.25 S9.2@5,27.675 5,27.1 2.743,24.843 2.743,20.507 5,18.25 S13.2@5,17.675 ; v1(3.353,48.311) 3.353,52.121 4.724,53.492 ; v1(4.724,52.883) 4.724,53.492 ; S1.2@5,55 4.724,54.724 4.724,53.492
  Int2 w0.254: v1(3.353,45.568) v1(3.353,48.311)
NetS2_2: S2.2 S6.2 S10.2 S14.2 U5.11 | length 61.9
  Top Layer w0.254: v1(11.278,49.835) 11.582,50.14 12.903,50.14 ; S14.2@15,17.675 15,18.25 12.344,20.906 12.344,24.444 15,27.1 S10.2@15,27.675 15,28.25 12.649,30.601 12.649,34.749 15,37.1 S6.2@15,37.675 14.302,38.373 14.302,43.844 14.072,44.075 14.072,48.971 12.903,50.14 ; S2.2@17.811,57.249 17.811,52.711 15.24,50.14 12.903,50.14
  Int2 w0.254: v1(3.353,53.035) 3.353,50.444 5.486,48.311 8.077,48.311 9.754,49.987 10.668,49.987 10.82,49.835 v1(11.278,49.835)
NetS3_2: S3.2 S7.2 S11.2 S15.2 U5.9 | length 61.1
  Top Layer w0.254: S3.2@17.811,49.069 16.256,47.515 16.256,41.504 22.754,35.006 22.754,34.854 ; S7.2@24.302,38.71 25,38.012 25,37.1 22.754,34.854 ; S15.2@25,17.675 23.93,17.675 21.031,20.574 21.031,23.131 25,27.1 S11.2@25,27.675 25,28.25 21.793,31.457 21.793,33.893 22.754,34.854
  Int2 w0.254: v1(4.699,43.129) 4.699,43.754 10.018,49.073 v1(17.526,49.073)
NetS4_2: S4.2 S8.2 S12.2 S16.2 U5.8 | length 83.2
  Top Layer w0.254: v1(16.764,42.52) 19.507,39.776 27.394,39.776 27.425,39.808 30.816,39.808 32.004,40.996 ; S16.2@35,17.675 32.922,17.675 31.09,19.507 31.09,24.994 33.771,27.675 S12.2@35,27.675 35,28.25 32.004,31.246 32.004,36.119 33.56,37.675 S8.2@35,37.675 35,38.25 34.302,38.948 34.204,38.948 32.156,40.996 32.004,40.996 ; S4.2@35,55 35.698,54.302 35.698,52.694 36.776,51.616 36.776,51.406 36.728,51.359 36.728,45.72 32.004,40.996
  Int2 w0.254: v1(5.969,43.129) 5.969,43.754 10.221,48.006 12.802,48.006 16.764,44.044 v1(16.764,42.52)
NetS5_1: S5.1 S6.1 S7.1 S8.1 U5.2 | length 145.3
  Top Layer w0.254: S5.1@5,32.325 5.016,32.309 v1(7.01,32.309) ; v1(13.564,42.977) 10.516,39.929 v1(10.516,32.461) 10.516,18.898 14.173,15.24 16.768,15.24 16.916,15.389 16.916,18.901 15.701,20.117 14.606,20.117 13.255,21.468 13.255,24.232 13.259,24.232 14.478,25.451 15.85,25.451 ; S6.1@15,32.325 15,31.75 17.983,28.767 17.983,27.584 15.85,25.451 ; S7.1@25,32.325 25,31.75 25.698,31.052 27.012,31.052 28.499,29.566 28.499,27.584 ; S8.1@35,32.325 35.698,31.627 35.698,30.139 36.728,29.108 36.728,26.06 35.662,24.994 33.833,24.994 32.614,23.774 32.614,20.879 33.223,20.269 35.662,20.269 36.576,19.355 36.576,15.389 36.427,15.24 32.918,15.24 30.937,17.221 28.648,17.221 28.499,17.37 28.499,27.584 ; 15.85,25.451 17.983,23.317 17.983,20.879 23.622,15.24 25.908,15.24 26.365,15.697 26.365,19.206 26.216,19.355 25.298,19.355 22.86,21.793 22.86,23.716 24.489,25.346 24.536,25.298 26.213,25.298 28.499,27.584
  Int2 w0.254: v1(7.01,32.309) 10.324,32.309 10.476,32.461 v1(10.516,32.461)
NetS9_1: S9.1 S10.1 S11.1 S12.1 U5.3 | length 86.1
  Top Layer w0.254: v1(12.192,42.977) 9.296,40.081 v1(9.296,22.595) 9.296,18.136 12.7,14.732 18.44,14.732 ; S10.1@15,22.325 15,21.966 15.698,21.268 16.057,21.268 18.44,18.885 18.44,14.732 ; S11.1@25,22.325 25,21.75 27.127,19.623 27.127,15.697 26.162,14.732 ; S12.1@35,22.325 35,21.75 37.084,19.666 37.084,14.881 36.935,14.732 26.162,14.732 ; 18.44,14.732 26.162,14.732
  Int2 w0.254: v1(5,22.325) 5.04,22.325 5.309,22.595 v1(9.296,22.595)
NetS13_1: S13.1 S14.1 S15.1 S16.1 U5.4 | length 63.2
  Top Layer w0.254: S13.1@5,12.325 10.801,12.325 ; v1(10.973,42.977) 7.925,39.929 7.925,16.198 10.95,13.173 10.95,12.474 10.801,12.325 ; S16.1@35,12.325 S15.1@25,12.325 S14.1@15,12.325 10.801,12.325
PWR: Q3.1 U4.43 | length 28.6
  Top Layer w0.152: 12.802,62.562 13.489,61.874 15.545,61.874
  Top Layer w0.254: 12.802,62.562 12.802,64.66 13.492,65.35 U4.43@13.696,65.35 ; 15.545,61.874 15.799,62.128 18.861,62.128 19.014,61.976 21.133,61.976 23.087,63.93 33.757,63.93 34.442,64.616 34.442,66.498 34.347,66.593 Q3.1@34.347,66.718
RINGING: Q5.1 R22.2 U.7 | length 40.4
  Top Layer w0.254: Q5.1@5.758,74.009 6.321,74.009 6.531,74.219 7.166,74.219 7.315,74.07 v1@7.315,73.071 ; v1(27.28,57.455) 27.432,57.607 v1(27.432,61.722)
  Int2 w0.254: v1(7.385,73.082) 7.408,73.059 10.761,73.059 13.564,70.256 16.615,70.256 16.764,70.108 16.764,69.037 16.154,68.428 16.154,62.179 16.383,61.951 16.383,59.969 ; v1(16.002,59.893) 16.459,59.893 18.898,57.455 v1(27.28,57.455)
RINGN: C32.1 U4.15 | length 12.3
  Top Layer w0.254: C32.1@2.134,76.157 C32.1@2.134,76.179 ; v1(3.874,66.853) 3.901,66.826 U4.15@4.885,66.826 ; U4.15@4.886,66.825 U4.15@5.491,66.825
  Int2 w0.254: v1(2.134,76.2) 2.645,75.689 2.645,67.167 3.009,66.802 3.823,66.802 v1(3.874,66.853)
RINGP: C31.1 U4.14 | length 11.4
  Top Layer w0.254: C31.1@3.658,76.157 C31.1@3.658,76.179 ; v1(4.42,67.361) 4.447,67.334 5.572,67.334 U4.14@5.581,67.325
  Int2 w0.254: v1(3.658,76.2) 3.153,75.695 3.153,67.482 3.273,67.361 v1(4.42,67.361)
SIM_CLK: J.C3 R2.2 U1.5 | length 3.1
  Top Layer w0.254: v1(25.146,47.701) 25.908,46.939 27.28,46.939 27.432,46.787 U1.5@27.432,46.332
SIM_DATA: J.C7 R1.1 U1.6 | length 3.8
  Top Layer w0.254: R1.1@23.285,46.51 25.118,46.51 v1(25.146,46.482) 25.385,46.243 U1.6@26.932,46.243
SIM_RST: J.C2 R3.2 U1.1 | length 5.4
  Top Layer w0.254: v1(24.841,45.263) 26.562,45.263 26.834,44.991 26.909,44.991 26.932,44.968 U1.1@26.932,44.893 26.955,44.916 26.955,45.168 27.355,45.568 28.258,45.568 28.715,45.11 R3.2@29.413,45.11
SIM_VDD: C5.1 J.C1 U1.3 U.18 | length 39.5
  Top Layer w0.254: v1(19.66,61.417) 18.854,61.417 18.651,61.62 18.23,61.62 17.932,61.323 17.932,60.488 21.336,57.085 21.336,52.148 21.531,51.953 v1(21.531,51.926) ; v1(21.641,45.415) 23.927,43.129 23.927,42.821 24.076,42.672 v1(24.841,42.672) C5.1@26.213,42.672 26.317,42.776 26.317,43.389 26.666,43.739 27.432,43.739 27.932,44.239 U1.3@27.932,44.893
  Int2 w0.254: v1(18.44,70.866) 18.702,70.866 20.513,69.054 20.513,64.47 20.496,64.452 20.496,64.061 19.914,63.478 19.914,62.694 19.66,62.44 v1(19.66,61.417) ; v1(21.531,51.926) 21.641,51.816 v1(21.641,45.415)
SPKN: C27.1 C28.1 C29.2 C30.2 C34.1 R100.1 U.12 | length 36.9
  Top Layer w0.254: R100.1@12.649,76.842 12.769,76.842 v1(12.802,76.81)
  Int2 w0.254: v1(9.601,77.114) 10.662,77.114 10.713,77.064 12.954,77.064 ; v1(12.802,76.81) 12.802,76.849 12.954,77.002 12.954,77.064 ; v2(14.021,76.81) 14.021,77.064 ; 14.478,77.064 14.021,77.064 ; 14.493,77.064 15.545,77.064 15.545,76.828 v1(15.56,76.814) ; 15.56,77.064 17.069,77.064 ; v1(17.069,76.81) 17.069,77.064 ; v1(18.582,76.797) 18.58,76.797 18.313,77.064 ; v1(21.839,61.849) 21.839,62.486 23.412,64.059 26.612,64.059 27.076,64.523 27.076,74.618 25.952,75.743 20.879,75.743 19.558,77.064 18.313,77.064 ; 12.954,77.064 14.021,77.064 ; 17.069,77.064 18.313,77.064
SPKP: C25.1 C26.1 C27.2 C28.2 C33.1 R100.2 U.11 | length 35
  Int2 w0.254: v1(11.278,77.572) 11.34,77.572 11.345,77.567 12.873,77.567 12.916,77.61 v1(12.783,77.743) ; 12.972,77.567 15.543,77.567 ; v1(15.543,77.822) 15.545,77.82 15.545,77.567 17.069,77.567 17.069,77.808 v1(17.077,77.817) ; 17.077,77.567 18.447,77.567 18.447,77.655 18.571,77.779 v1(18.571,77.818) ; 18.571,77.567 19.817,77.567 21.133,76.251 26.162,76.251 27.584,74.828 27.584,64.313 26.822,63.551 23.622,63.551 22.959,62.888 v1(22.959,61.854)
  other v2: 14.021,77.724
SWDCLK: P3.4 U4.37 | length 1.9
  Bottom Layer (GND) w0.305: P3.4@12.081,63.07 12.228,62.922 13.126,62.922 v1(13.716,62.332)
SWDDAT: P3.2 U4.34 | length 0.4
  Top Layer w0.254: U4.34@11.656,60.75 11.656,61.102 v1(11.666,61.112)
USART1_CTS: R19.1 U.4 | length 24.4
  Top Layer w0.254: R19.1@12.802,56.845 13.259,56.845 v1(13.716,57.302) ; v1(30.552,57.002) 30.552,61.635 v1@30.639,61.722
  Int2 w0.254: v1(13.716,57.302) 15.545,57.302 17.78,55.067 28.662,55.067 30.552,56.957 v1(30.552,57.002)
  other v1: 30.632,61.722
USART1_RTS: R20.1 R24.1 U.3 | length 32.3
  Top Layer w0.254: v1(31.568,56.985) 31.568,61.206 31.739,61.377 v1(31.699,61.417) ; R24.1@35.161,61.341 R24.1@35.204,61.385
  Top Layer w0.305: v1(31.699,61.417) 32.918,62.636 34.138,62.636 35.082,61.692 35.082,61.508 R24.1@35.204,61.385 R24.1@35.204,61.41
  Int2 w0.254: v1(12.497,58.979) 13.208,58.268 13.208,57.092 13.607,56.693 15.004,56.693 17.29,54.407 29.627,54.407 31.568,56.348 v1(31.568,56.985)
  other v1: 35.204,61.417
USART1_RXD: R8.1 R25.1 U.2 | length 35.8
  Top Layer w0.254: R8.1@11.703,56.845 11.728,56.845 12.462,56.111 12.926,56.111 v1(12.954,56.083)
  Top Layer w0.305: v1(32.614,55.778) 33.833,56.998 35.966,56.998 36.271,57.302 36.271,59.741 ; v1(32.918,61.417) 33.376,61.874 33.943,61.874 34.595,61.222 34.595,59.919 34.773,59.741 36.271,59.741 ; R25.1@36.271,60.535 36.271,59.741
  Int2 w0.254: v1(12.954,56.083) 13.961,56.083 14.285,55.759 14.723,55.759 16.837,53.645 30.48,53.645 v1(32.614,55.778)
USART1_TXD: R18.1 U.1 | length 32.5
  Top Layer w0.254: v1(32.766,56.998) 32.766,60.198 v1(33.824,61.256)
  Int2 w0.254: v1(11.855,57.76) 12.344,57.27 12.344,55.778 12.649,55.474 13.792,55.474 16.383,52.883 31.699,52.883 33.376,54.559 33.376,56.388 v1(32.766,56.998)
  Bottom Layer (GND) w0.305: U.1@33.939,61.849 U.1@33.967,61.821
VBAT: P1.5 Q1.3 | length 10.4
  Top Layer w0.254: P1.5@25.298,67.768 26.773,67.768 28.499,69.494 31.394,69.494 32.461,70.561 32.461,72.268 Q1.3@32.7,72.507
VCC: C2.1 C3.2 C4.2 C6.1 C7.2 C51.2 C100.1 D1.1 P4.1 Q1.2 R5.1 R30.2 R31.2 R32.1 U3.1 U3.3 U5.20 U6.3 U10.1 U10.3 U.34 U.35 | length 210.3
  Top Layer w0.254: R31.2@33.56,70.409 33.579,70.409 33.727,70.557 33.727,71.065 33.833,71.171 33.833,72.39 34.327,72.884 34.327,73.084 34.7,73.457 Q1.2@34.9,73.457
  Top Layer w0.508: 0.762,82.296 0.908,82.15 ; 0.891,83.21 C100.1@1.852,83.21 ; U10.1@1.869,82.15 U10.1@1.898,82.179 ; R30.2@8.197,48.92 8.839,48.92
  Top Layer w0.762: U10.3@1.817,80.198 0.798,80.198 0.762,80.162 ; C100.1@1.829,83.206 C100.1@1.86,83.175 ; U10.1@1.898,82.179 1.94,82.221 1.94,83.144 1.971,83.175 C100.1@1.981,83.175 ; v1@5.791,68.58 1.067,68.58 ; U6.3@14.551,1.945 14.551,2.008 14.421,2.138 14.421,2.686 14.116,2.991 11.83,2.991 11.007,2.168 10.093,2.168 9.754,1.829 8.077,3.505 1.676,3.505 1.067,4.115 1.067,47.092 ; v1(14.935,52.883) 14.935,51.664 14.173,50.902 10.82,50.902 8.839,48.92 6.858,46.939 1.219,46.939 1.067,47.092 ; Q1.2@34.9,73.457 36.49,73.457 36.714,73.681 v1(37.425,73.681) ; v1(37.49,73) 37.425,73.065 v1(37.425,73.681) ; C3.2@37.643,76.352 37.905,76.09 C4.2@37.905,74.676 37.66,74.431 37.66,73.94 ; C2.1@37.795,78.181 37.801,78.187 37.801,79.323 37.782,79.343 37.782,79.895 C6.1@37.338,80.339 37.338,80.464 37.782,80.908 38.416,80.908 38.862,81.354 38.862,84.865 38.786,84.941 D1.1@38.786,85.311 ; C3.2@37.817,76.352 C2.1@37.817,78.334 ; R32.1@38.068,62.332 38.688,62.332 39.135,62.778 R5.1@39.135,71.476 39.135,73.234 38.688,73.681 v1(37.425,73.681) ; D1.1@38.71,85.233 38.555,85.233 38.481,85.307 38.481,85.569 37.403,86.647 36.42,87.63 31.867,87.63 31.257,87.02 30.21,87.02 29.952,86.324 29.952,86.29 29.901,86.187 29.864,86.087 29.84,86.063 29.505,85.381 29.505,85.346 29.426,85.219 29.394,85.154 29.371,85.13 28.97,84.487 28.97,84.451 28.856,84.305 28.835,84.271 28.812,84.248 28.35,83.65 28.35,83.614 28.197,83.453 28.192,83.447 28.169,83.424 27.652,82.879 27.652,82.87 27.28,82.498 27.252,82.498 26.68,82.007 26.657,81.984 26.637,81.97 26.483,81.838 26.447,81.838 25.826,81.406 25.803,81.383 25.753,81.355 25.616,81.26 25.581,81.26 24.917,80.891 24.894,80.868 24.811,80.832 24.807,80.83 24.695,80.768 24.661,80.768 23.963,80.468 23.939,80.444 23.821,80.407 23.731,80.368 23.697,80.368 22.972,80.141 22.948,80.117 22.793,80.085 22.731,80.065 22.698,80.065 21.956,79.913 21.93,79.887 21.738,79.868 21.706,79.861 21.673,79.861 20.923,79.785 20.897,79.759 19.357,79.759 19.331,79.785 18.581,79.861 18.548,79.861 18.516,79.868 18.324,79.887 18.298,79.913 17.556,80.065 17.523,80.065 17.461,80.085 17.306,80.117 17.282,80.141 16.643,80.341 16.557,80.368 16.523,80.368 16.433,80.407 16.315,80.444 16.291,80.468 15.593,80.768 15.559,80.768 15.443,80.832 15.36,80.868 15.337,80.891 14.673,81.26 14.638,81.26 14.501,81.355 14.451,81.383 14.428,81.406 13.807,81.838 13.771,81.838 13.617,81.97 13.597,81.984 13.574,82.007 13.002,82.498 12.974,82.498 12.602,82.87 12.602,82.879 12.085,83.424 12.062,83.447 12.057,83.453 11.904,83.614 11.904,83.65 11.442,84.248 11.419,84.271 11.398,84.305 11.284,84.451 11.284,84.487 10.883,85.13 10.86,85.154 10.828,85.219 10.749,85.346 10.749,85.381 10.122,86.658 9.977,86.861 9.64,87.198 1.208,87.198 0.762,86.752 0.762,82.296 0.762,80.162 ; 0.762,80.162 0.762,68.885 1.067,68.58 ; 1.067,47.092 1.067,68.58
  Int2 w0.6: v1(5.791,68.428) 7.817,68.428 v1(7.975,68.27) 8.388,68.27 8.687,67.97 v1(8.687,66.751)
  Bottom Layer (GND) w0.762: U3.3@8.216,68.58 8.086,68.451 8.1,68.451 8.23,68.58 8.359,68.451 U3.3@8.382,68.451 ; U.35@36.789,73.099 36.87,73.018 37.472,73.018 v1(37.49,73) ; 36.789,73.649 37.393,73.649 v1(37.425,73.681) ; U.34@37.425,74.219 v1(37.49,74.219)
pads on no net: J4.2 J4.3 J4.4 J.C6 J.X1 J.X2 U1.4 U4.5 U4.6 U4.13 U4.21 U4.45 U5.5 U5.15 U.14 U.22 U.23 U.29 U.38 U.40 U.41 U.42

## Polygon pours and split planes (outlines as drawn)
GND on Int1 (GND) "GND_L02_P001" (solid, pour order 1): 0.152,90.373 -0.152,90.068 -0.152,0 40.081,0 40.386,0.305 40.386,90.373
GND on Bottom Layer (GND) "GND_L04_P002" (solid, pour order 2): -0.152,0 -0.152,90.373 40.386,90.373 40.386,0.305 40.081,0

## Silkscreen, mask and mechanical layers (free items; w line width, h text height)
Mechanical 1:
  drawing of 212 lines, arcs and shapes, not listed